# Altium PCB RD15002WV-20150923.PcbDoc (part 2 of 2)
Units mil, origin at the board's own origin, x right, y up, seen from the top; angles counter-clockwise.
Board outline 4341.03 x 4341.12 mil, 2 copper layers (Top Layer, Bottom Layer); 295 components, 256 nets, 1005 pads, 234 vias.
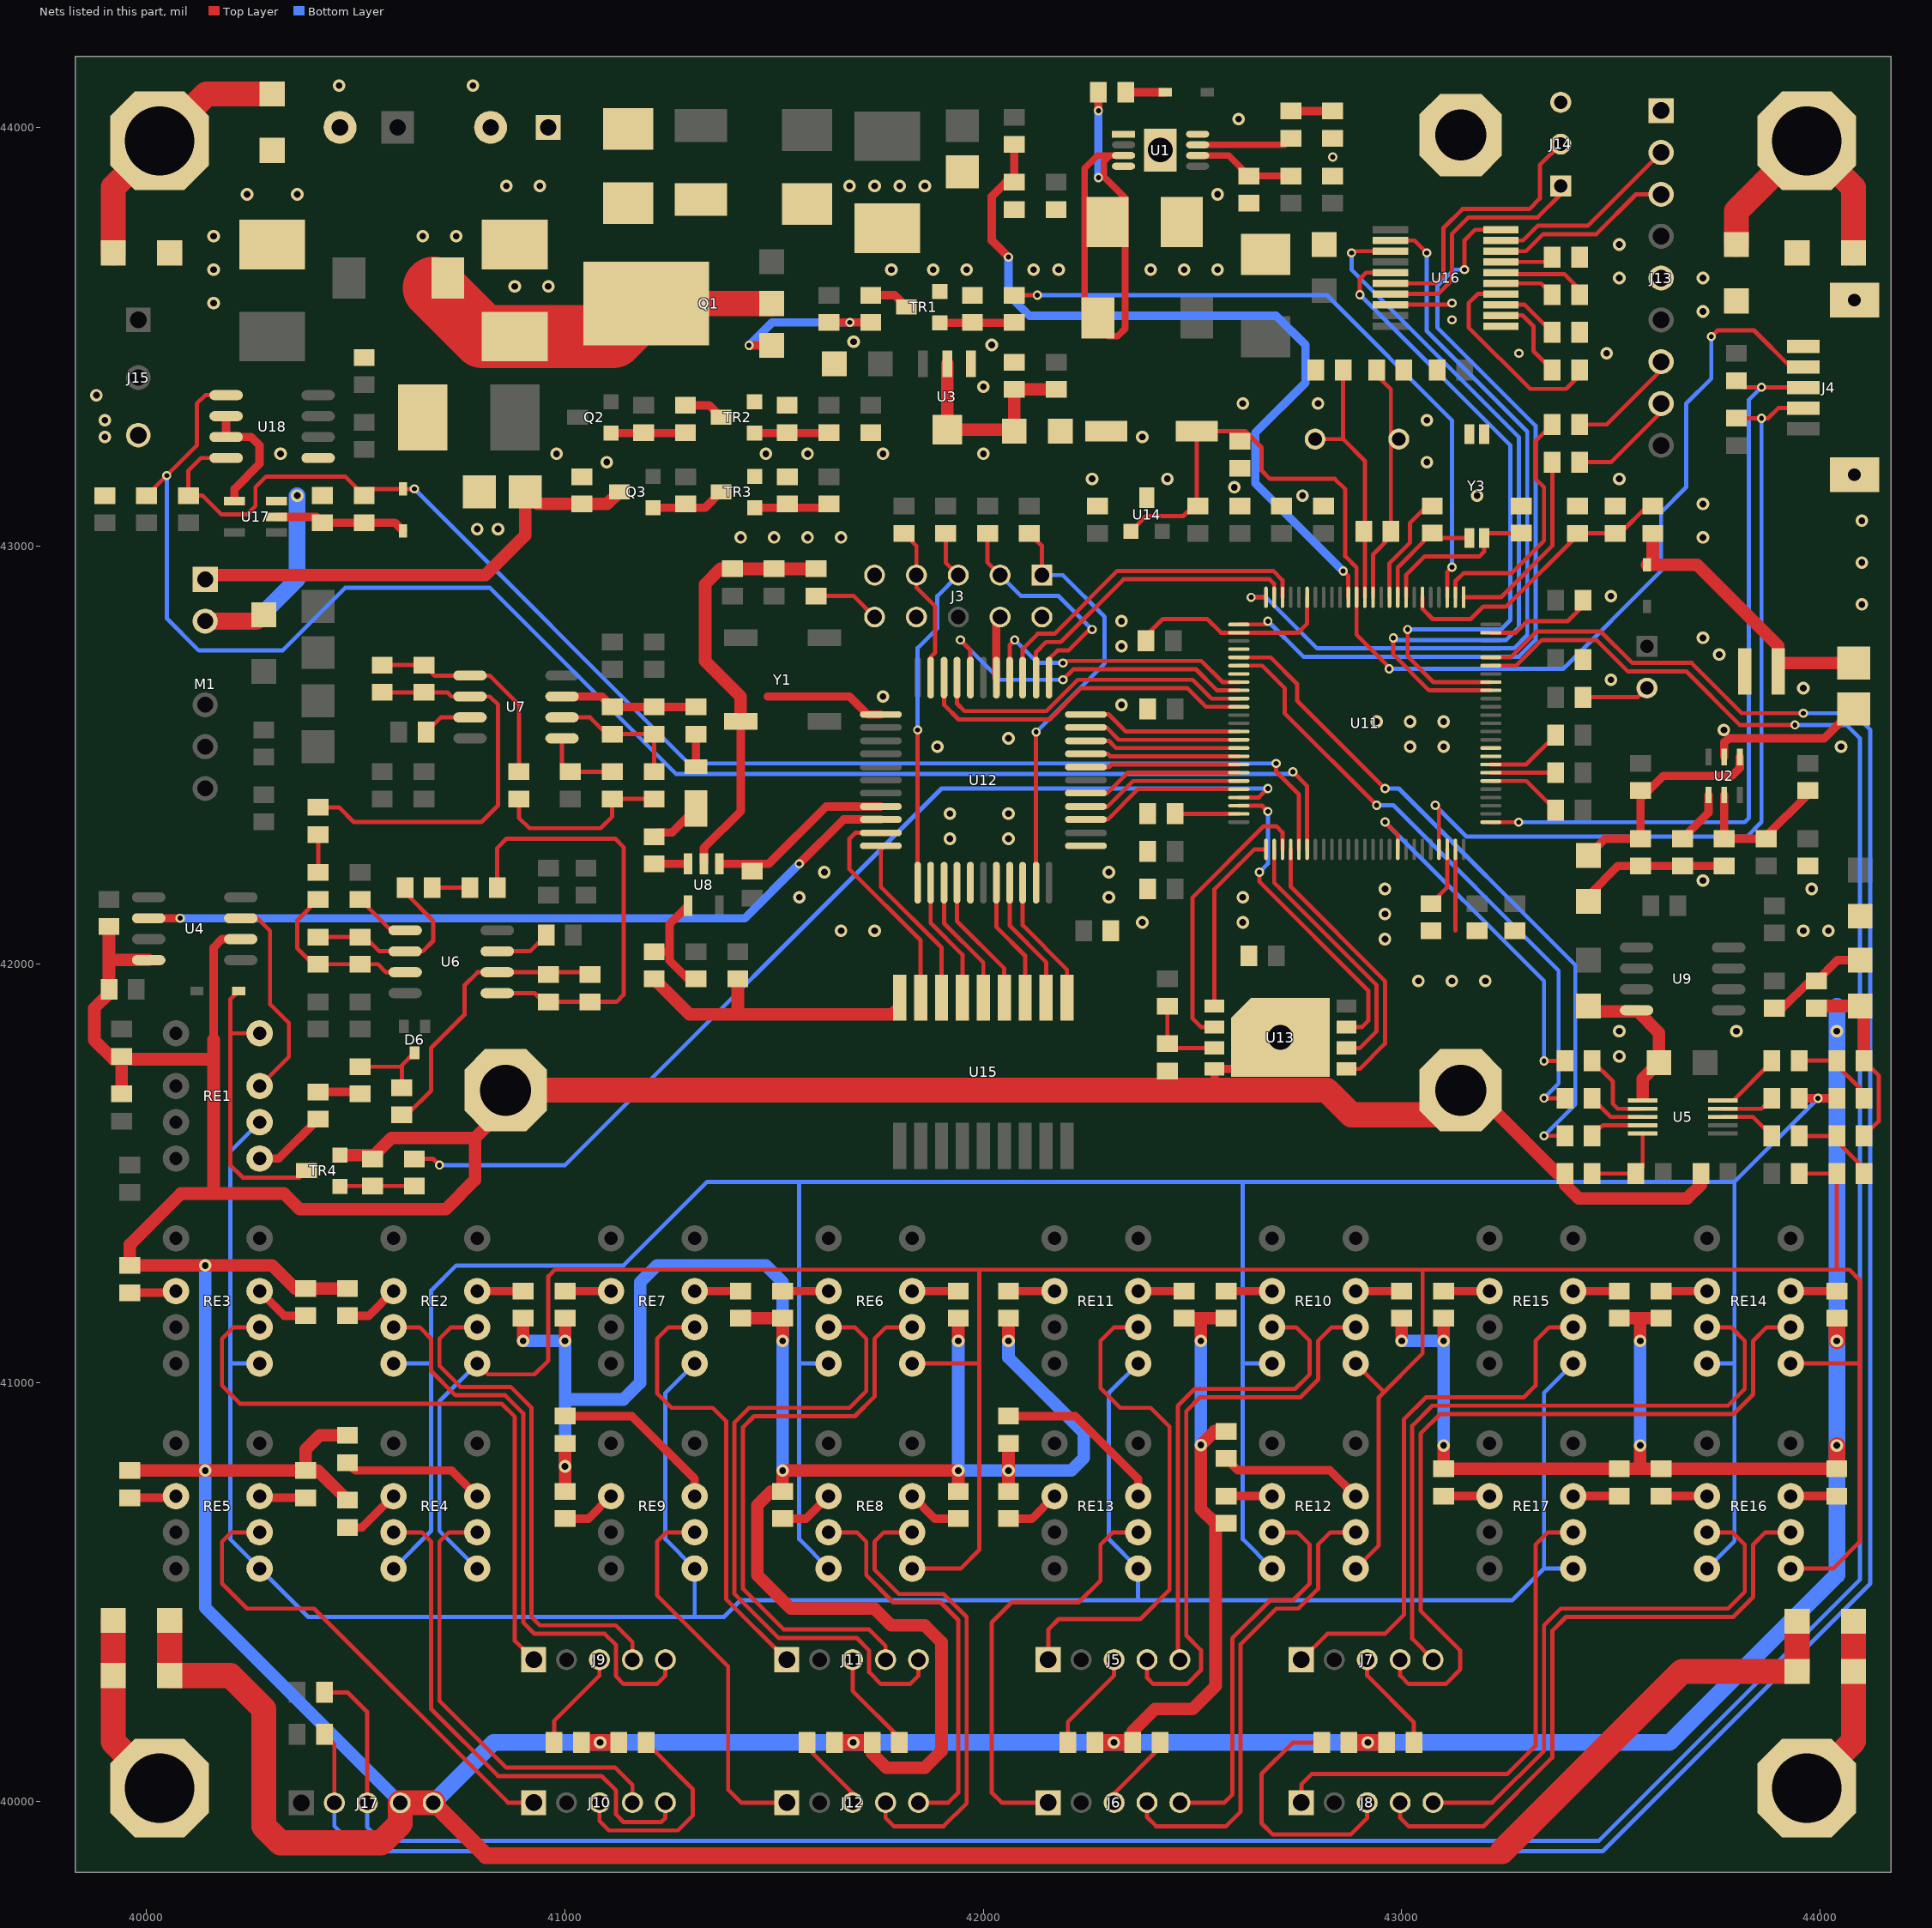
[diagram p2: the nets of this part, all layers, seen from the top]

## Via types
v1: diameter 30, hole 16, Top Layer to Bottom Layer, 140 vias
v2: diameter 22, hole 12, Top Layer to Bottom Layer, 94 vias

## Nets (pads, with @x,y where several pads share a name; then routed paths per layer and width w, separated by ;. In a path a pad name is that pad's centre, name@x,y a point inside that pad or via, vN(x,y) a via of type N, cw(c..) or ccw(c..) an arc to the next point about the centre after c; other vN are vias at no path point) (continued)
DGND: BT1.2 C2.2 C3.2 C4.1 C5.2 C6.2 C8.2 C9.2 C10.1 C12.1 C13.1 C14.1 C15.2 C16.2 C17.2 C18.1 C19.1 C20.2 C21.2 C24.1 C25.2 C28.1 C29.1 C30.2 C31.2 C32.1 C33.2 C34.2 C35.2 C36.1 C37.1 C45.1 C54.1 C55.1 C56.1 C57.1 C58.1 C59.2 C60.2 C61.2 C62.2 C63.1 C64.2 C65.2 C66.2 C67.2 C68.2 C69.2 C70.2 C71.2 C72.2 C73.2 C74.1 C75.1 C76.2 C77.2 C78.2 C79.1 C80.2 C81.1 C82.1 C83.2 C84.1 C85.2 C86.2 C87.2 C88.2 C89.2 C90.2 C125.1 C126.1 C136.1 C137.1 C138.2 C140.2 C141.1 C143.2 C144.2 C145.1 D3.1 D4.1 J1.2 J2.2 J3.2 J3.4 J4. J4.5 J13.1 J13.5 J14.3 J15.3 J17.4 J17.5 M1.2 pad.1 pad.2 pad.3 R6.1 R7.2 R8.1 R9.1 R12.1 R17.2 R18.1 R21.1 R23.1 R25.2 R55.2 R58.1 R59.1 R60.2 R61.1 R62.2 R63.1 R76.2 R79.2 R80.1 R81.2 R82.1 R83.2 R84.1 R85.2 R86.1 R87.2 R88.1 R89.2 R101.1 R102.2 R103.1 R104.2 R105.1 R106.2 R107.1 R108.2 R109.1 R110.2 R111.1 R112.2 R113.1 R114.2 R115.1 R116.2 R121.2 R123.1 S1.1 TR1.2 TR2.2 TR3.2 TR4.2 U1. U1.4 U1.8 U2.2 U3.1 U4.4 U4.6 U5.6 U8.2 U9.4 U11.10 U11.20 U11.27 U11.74 U11.99 U12.5 U12.12 U12.27 U12.34 U13.4 U13.9 U14.3 U15.9 U16.1 U16.18 U17.3 U18.5 Y1.2 Y3.2 Y3.3 | length 33130.1
  Top Layer w10: C65.2@42389,42773 42389,42785 42429,42825 42535,42825 42567.65,42792.35 42752.35,42792.35 42773.99,42813.99 U11.20@42773.99,42877 ; U11.10@42970.83,42877 42970.83,42958.83 43020,43008 43020,43055 43060.38,43095.38 C84.1@43073,43095.38 ; U16.18@42973.22,43576.18 43116.18,43576.18 v2(43120,43580) ; 43128.32,42080.32 U11.74@43128.32,42274.64 ; U11.99@43212.96,42792.35 43272.35,42792.35 43300,42820 43397,42820 43433,42856 C70.2@43433,42870 ; C35.2@44105,41589.63 44140,41624.63 44140,41734.63 C34.2@44105,41769.63
  Top Layer w20: 40160,41820 40160,42040 40180,42060 U4.6@40225,42060 ; U8.2@41332,42240 41332,42278 41420,42366 Y1.2@41420,42580 Y1.2@41425,42580 ; 41485,42640 41680,42640 41723,42597 U12.34@41755,42597 ; U12.27@42031,42685 42031,42821 J3.4@42040,42830 ; 42552.52,41699.48 U13.4@42552.52,41750 U13.9@42603,41750 ; C16.2@43446,42150 43446,42164 43517,42235 R12.1@43771,42235 ; U2.2@43770.6,42495.32 43770.6,42530.6 ; 43770.6,42529 43781.6,42540 44010,42540 C30.2@44080,42610
  Top Layer w30: 39910,42010 U4.4@40005,42010 ; C31.2@39910,42090 39910,41930 39875,41895 39875,41819 39921,41773 40160,41773 ; R25.2@39940,41690 C36.1@39940,41780 ; R107.1@39960,40790 40409,40790 R105.1@40480,40719 ; 40160,41452 40160,41820 ; R108.2@40380,40790 40380,40840 40414,40874 R106.2@40480,40874 ; TR4.2@40462,41544.02 40544.02,41544.02 40585,41585 40785,41585 ; R101.1@40480,41225 40355,41225 40300,41280 R103.1@39960,41280 39960,41330 40082,41452 40329,41452 40366,41415 40715,41415 40785,41485 40785,41585 ; pad.3@40858,41699 40858,41658 40785,41585 ; v1(40900,41100) R102.2@40900,41154 ; R115.1@41000,40740 R116.2@41000,40855 ; v1(41000,41100) R111.1@41000,41154 ; R55.2@41213,41965 41298,41880 41782,41880 41800,41898 U15.9@41800,41920 ; 41413,41881 C45.1@41413,41965 ; R112.2@41420,41154 R109.1@41520,41154 v1(41520,41100) ; Y1.2@41420,42580 41420,42640 41335,42725 41335,42908 41372,42945 C63.1@41600,42945 ; C136.1@41734,40140 41734,40114 41768,40080 41860,40080 41900,40120 41900,40380 41860,40420 41780,40420 41740,40460 41540,40460 41460,40540 41460,40707 41493,40740 R113.1@41520,40740 v1(41520,40790) v1(41940,40790) R114.2@41940,40740 ; v1(41940,41100) R110.2@41940,41154 ; R80.1@42060,40740 R81.2@42060,40855 ; v1(42060,41100) R61.1@42060,41154 ; C55.1@42357,40140 42357,40167 42410,40220 42500,40220 42555.25,40275.25 42555.25,40662.75 42520,40698 v1(42520,40851) 42553,40884 R79.2@42580,40884 ; R62.2@42480,41154 R59.1@42580,41154 ; v1(42520,41100) 42520,41154 ; v1(43000,41100) R60.2@43000,41154 ; v1(43100,40850) R88.1@43100,40794 R87.2@44039.98,40794.02 ; v1(43100,41100) R84.1@43100,41154 ; pad.2@43141,41699 43173,41699 43372.37,41499.63 R23.1@43390,41499.63 43390,41473 43423,41440 43682,41440 43715,41473 C32.1@43715,41499.63 ; C60.2@43446,41900 43459,41887 43564.37,41887 43615,41836.37 C33.2@43615,41765 43576,41726 43576,41684 ; R85.2@43520,41154 R82.1@43620,41154 ; 43570,40794 v1(43570,40850) ; v1(43570,41100) 43570,41154 ; C58.1@43991.37,41895 43996.37,41900 C59.2@44095.74,41900 44105,41890.74 C34.2@44105,41769.63
  Top Layer w40: M1.2@40140,42820 40265,42820 R17.2@40280,42835 ; J17.5@40684.96,39996 40810.96,39870 43230,39870 43240,39880 ; C125.1@41039,40140 C126.1@41129,40140 ; C137.1@41644,40140 C136.1@41734,40140 ; C54.1@42267,40140 C55.1@42357,40140 ; C57.1@42874,40140 C56.1@42964,40140 ; R87.2@44039.98,40794.02 v1(44040,40850) ; v1(44040,41100) R83.2@44040,41154
  Top Layer w60: C85.2@40055,40432 C86.2@40055,40300 40200,40300 40280,40220 40280,39940 40320,39900 40560,39900 40606.22,39946.22 J17.4@40606.22,39996 J17.5@40684.96,39996 ; pad.3@40858,41699 42821,41699 42880,41640 43082,41640 pad.2@43141,41699 ; 43240,39880 43670,40310 C88.2@43945,40310 C87.2@43945,40430
  Bottom Layer w30: v1(40140,41280) 40140,40462.22 J17.4@40606.22,39996 ; v1(40900,41100) v1(41000,41100) v1(41000,40800) ; 41000,40960 41140,40960 41180,41000 41180,41240 41220,41280 41480,41280 41520,41240 v1(41520,40790) ; v1(41940,41100) v1(41940,40790) 42210,40790 42240,40820 42240,40880 42060,41060 v1(42060,41100) ; v1(42520,40851) v1(42520,41100) ; v1(43000,41100) v1(43100,41100) v1(43100,40850) ; v1(43570,40850) v1(43570,41100)
  Bottom Layer w40: M1.2@40140,42820 40260,42820 40360,42920 v1(40360,43120) ; J17.4@40606.22,39996 J17.5@40684.96,39996 40828.96,40140 v1(41084,40140) v1(41689,40140) v1(42312,40140) v1(42919,40140) 43640,40140 44040,40540 44040,41900
  other v1: 40140,40790 42060,40790 43520,41780 43520,41840 43800,41840 44040,41840 43040,41960 43120,41960 43200,41960 42960,42060 41660,42080 41740,42080 43960,42080 44020,42080 42380,42100 42620,42100 42960,42120 41560,42160 42300,42160 42620,42160 42960,42180 43980,42180 43720,42200 41620,42220 42300,42220 41920,42300 42060,42300 41920,42360 42060,42360 41890,42520 43020,42520 43100,42520 44050,42520 42060,42540 43770,42560 42940,42580 43020,42580 43100,42580 42330,42620 41760,42640 43960,42660 43500,42680 43759,42740 42330,42760 43720,42780 42330,42820 44100,42860 43500,42880 44100,42960 41420,43020 41500,43020 41580,43020 41660,43020 43720,43020 40790,43040 40840,43040 44100,43060 43720,43100 42763,43120 43180,43120 42600,43140 42260,43160 42440,43160 43520,43160 41100,43200 43060,43200 40320,43220 40980,43220 41480,43220 41580,43220 41760,43220 42000,43220 39900,43260 42380,43260 39900,43300 43060,43300 42620,43340 42800,43340 39880,43360 42000,43380 43490,43460 42020,43480 41690,43488 43720,43560 40160,43580 40880,43620 40960,43620 43520,43640 43720,43640 40160,43660 41780,43660 41880,43660 41960,43660 42120,43660 42180,43660 42400,43660 42480,43660 42560,43660 43520,43720 40160,43740 40660,43740 40740,43740 40240,43840 40360,43840 42560,43840 40860,43860 40940,43860 41680,43860 41740,43860 41800,43860 41860,43860 42610,44020 40460,44100 40780,44100
  other v2: 43280,43460 43120,43540 42835,43929
DTU_DCD: J13.7 R68.1 | length 268.8
  Top Layer w10: R68.1@43425,43290 43490,43290 43620,43420 J13.7@43620,43440
DTU_ONOFF: J13.8 R69.1 | length 264.7
  Top Layer w10: R69.1@43425,43200 43500,43200 43620,43320 J13.8@43620,43340
DTUPWR_SW: R5.2 U11.3 | length 1597.6
  Top Layer w10: R5.2@42073.99,43599 v2(42129,43599) ; U11.3@43108.63,42877 43108.63,42937.63 v2(43120,42949)
  Bottom Layer w10: v2(42129,43599) 42821,43599 43120,43300 v2(43120,42949)
FM_HOLD1: U11.48 U13.7 | length 749.9
  Top Layer w10: U11.48@42610.6,42378.97 42666.03,42378.97 v2(42680,42365) ; v2(42660,42220) 42660,42197 42920,41937 42920,41865 42905,41850 U13.7@42867.48,41850
  Bottom Layer w10: v2(42660,42220) 42680,42240 v2(42680,42365)
GND: 
GND_EARTH1: C61.1 C62.1 pad.4 | length 629.4
  Top Layer w60: C61.1@39920,43700 39920,43857 40143,44080 C62.1@40300,44080
GND_EARTH2: C85.1 C86.1 pad.5 | length 447
  Top Layer w60: C85.1@39920,40432 39920,40142 pad.5@40031,40031
GND_EARTH3: C87.1 C88.1 pad.6 | length 445.4
  Top Layer w60: pad.6@43968,40031 44080,40143 C88.1@44080,40310 C87.1@44080,40430
GND_EARTH4: C89.1 C90.1 pad.7 | length 632
  Top Layer w60: C89.1@43800,43720 43800,43800 pad.7@43968,43968 44080,43856 C90.1@44080,43700
GPIO0: U11.39 U12.22 | length 382.5
  Top Layer w10: U12.22@42245,42597 42300,42597 42340.87,42556.13 U11.39@42610.6,42556.13
GPIO1: U11.40 U12.21 | length 377.8
  Top Layer w10: U12.21@42245,42566 42294,42566 42323.55,42536.45 U11.40@42610.6,42536.45
GPIO2: U11.41 U12.20 | length 372.7
  Top Layer w10: U12.20@42245,42534 42300,42534 42317.24,42516.76 U11.41@42610.6,42516.76
GPIO3: U11.42 U12.19 | length 368.1
  Top Layer w10: U12.19@42245,42503 42297,42503 42302.92,42497.08 U11.42@42610.6,42497.08
GPIO4: U11.43 U12.18 | length 368.2
  Top Layer w10: U12.18@42245,42471 42300,42471 42306.39,42477.39 U11.43@42610.6,42477.39
GPIO5: U11.44 U12.16 | length 385.8
  Top Layer w10: U12.16@42245,42409 42296,42409 42344.71,42457.71 U11.44@42610.6,42457.71
GPIO6: U11.45 U12.15 | length 390.9
  Top Layer w10: U12.15@42245,42377 42297,42377 42358.02,42438.02 U11.45@42610.6,42438.02
GPIO7: U11.46 U12.14 | length 395.6
  Top Layer w10: U12.14@42245,42346 42297,42346 42369.34,42418.34 U11.46@42610.6,42418.34
GREEN: R26.1 R29.1 RE2.5 RE4.5 RE6.5 RE8.5 RE10.5 RE12.5 RE14.5 RE16.5 | length 7297.5
  Top Layer w10: RE2.5@40790,41045.79 40815.79,41020 40927,41020 40960,41053 40960,41254 40976,41270 44070,41270 44095,41245 44095,40620 44030.79,40555.79 RE16.5@43930,40555.79 ; RE8.5@41830,40555.79 41945.79,40555.79 41990,40600 41990,41270 ; RE6.5@41830,41045.79 41989.79,41045.79 ; RE12.5@42890,40555.79 42945,40610.79 42945,40965 43050,41070 43050,41270 ; RE10.5@42890,41045.79 42957.89,40977.9 ; RE14.5@43930,41045.79 44094.79,41045.79 ; R26.1@43950,41499.63 R29.1@44040,41499.63 44040,41270
  Bottom Layer w10: RE4.5@40790,40555.79 40700,40645.79 40700,40955.79 RE2.5@40790,41045.79
GREEN_CH1: J9.4 RE2.6 | length 1235.7
  Top Layer w10: RE2.6@40790,41132.4 40727.4,41132.4 40700,41105 40700,41040 40750,40990 40870,40990 40920,40940 40920,40440 40940,40420 41121,40420 41161.22,40379.78 J9.4@41161.22,40338
GREEN_CH2: J10.4 RE4.6 | length 1066.4
  Top Layer w10: RE4.6@40790,40642.4 40722.4,40642.4 40700,40620 40700,40240 40860,40080 41120,40080 41161.22,40038.78 J10.4@41161.22,39996.26
GREEN_CH3: J11.4 RE6.6 | length 1401
  Top Layer w10: J11.4@41766.22,40338 41766.22,40371 41727.22,40410 41523,40410 41425,40508 41425,40893 41452,40920 41693,40920 41740,40967 41740,41105 41767.4,41132.4 RE6.6@41830,41132.4
GREEN_CH4: J12.4 RE8.6 | length 1139.3
  Top Layer w10: J12.4@41766.22,39996.26 41766.22,39959.78 41786,39940 41905,39940 41960,39995 41960,40440 41905,40495 41798,40495 41740,40553 41740,40620 41762.4,40642.4 RE8.6@41830,40642.4
GREEN_CH5: J5.4 RE10.6 | length 1367.8
  Top Layer w10: J5.4@42391.22,40338 42391.22,40294.78 42406,40280 42487,40280 42520,40313 42520,40361 42485,40396 42485,40932 42518,40965 42758,40965 42800,41007 42800,41100 42832.4,41132.4 RE10.6@42890,41132.4
GREEN_CH6: J6.4 RE12.6 | length 1129.6
  Top Layer w10: J6.4@42391.22,39996.26 42391.22,39961.78 42413,39940 42580,39940 42615,39975 42615,40375 42700,40460 42753,40460 42800,40507 42800,40613 42829.4,40642.4 RE12.6@42890,40642.4
GREEN_CH7: J7.4 RE14.6 | length 1872.4
  Top Layer w10: J7.4@42996.22,40338 42996.22,40299.78 43016,40280 43105,40280 43140,40315 43140,40360 43045,40455 43045,40878 43092,40925 43793,40925 43840,40972 43840,41100 43872.4,41132.4 RE14.6@43930,41132.4
GREEN_CH8: J8.4 RE16.6 | length 1520.1
  Top Layer w10: J8.4@42996.22,39996.26 42996.22,39959.78 43016,39940 43196,39940 43360,40104 43360,40407 43393,40440 43792,40440 43840,40488 43840,40613 43869.4,40642.4 RE16.6@43930,40642.4
INIT: J3.8
ISP_EN: C63.2 J3.10 | length 160.7
  Top Layer w10: C63.2@41600,42880 41690,42880 J3.10@41740,42830
ISP_TCK: J3.1 R64.1 U12.10 | length 1006.8
  Top Layer w10: R64.1@42110,43030 42140,43000 J3.1@42140,42930 ; U12.10@42126,42195 v2(42126,42555)
  Bottom Layer w10: v2(42126,42555) 42290,42719 42290,42830 42190,42930 J3.1@42140,42930
ISP_TDI: J3.5 R66.2 U12.1 | length 887.6
  Top Layer w10: U12.1@41843,42195 v2(41843,42560) ; R66.2@41910,43030 41910,42960 J3.5@41940,42930
  Bottom Layer w10: v2(41843,42560) 41843,42756 41890,42803 41890,42880 J3.5@41940,42930
ISP_TDO: J3.7 R67.1 U12.32 | length 380.6
  Top Layer w10: R67.1@41810,43030 41840,43000 41840,42900 41885,42855 41885,42745 41874,42734 U12.32@41874,42685
ISP_TMS: J3.3 R65.1 U12.23 | length 559.3
  Top Layer w10: R65.1@42010,43030 42010,42960 J3.3@42040,42930 ; U12.23@42157,42685 42157,42730 42177,42750 ; 42181,42750 42203,42750 42253,42800 v2(42260,42800)
  Bottom Layer w10: J3.3@42040,42930 42090,42880 42180,42880 v2(42260,42800)
ISP_TRST: J3.9
NetBT1_1: BT1.1 C30.1 D5.2 R22.2 | length 710.4
  Top Layer w30: D5.2@43586,42955 43706,42955 43900,42761 BT1.1@43900,42700 ; 43600,42955 R22.2@43600,43030 ; BT1.1@43900,42720 C30.1@44080,42720
NetC1_1: C1.1 D3.2 L2.1 U1.3 | length 1192.1
  Top Layer w16: L2.1@42242,43540 42242,43902 42272.82,43932.82 U1.3@42335,43932.82 42301.82,43932.82 42288,43919 42288,43882 42339,43831 42339,43519 42321,43501 L2.1@42300,43501
  Top Layer w20: v2(42275,44040) C1.1@42275,44084
  Bottom Layer w20: v2(42275,43880) v2(42275,44040)
NetC1_2: C1.2 D2.2 U1.1 | length 95
  Top Layer w20: C1.2@42340,44084 D2.2@42435,44084
NetC2_1: C2.1 L1.1 Q1.2 | length 887.8
  Top Layer w60: Q1.2@41194,43579 Q1.2@41494,43579
  Top Layer w150: L1.1@40687,43616 40803,43500 41115,43500 Q1.2@41194,43579
NetC7_1: C7.1 R8.2 | length 100
  Top Layer w20: C7.1@42735,44039 R8.2@42835,44039
NetC7_2: C7.2 U1.7 | length 229.3
  Top Layer w16: U1.7@42512.17,43958.41 42719.41,43958.41 C7.2@42735,43974
NetC11_2: C11.2 R11.2 R12.2 U2.5 | length 361.4
  Top Layer w20: U2.5@43770.6,42404.76 43770.6,42300.4 R12.2@43771,42300 C11.2@43871,42300 43871,42306 43971,42406 R11.2@43971,42415
NetC13_2: C13.2 C16.1 R10.1 U2.1 | length 531.1
  Top Layer w20: C16.1@43446,42260 43486,42300 C13.2@43571,42300 43571,42396 43625,42450 43789,42450 43808,42469 U2.1@43808,42495.32
NetC14_2: C14.2 U2.4 | length 130.5
  Top Layer w20: C14.2@43671,42300 43733.2,42362.2 U2.4@43733.2,42404.76
NetC17_1: C17.1 C18.2 R13.1 U3.2 | length 518.8
  Top Layer w30: U3.2@41914.1,43435 U3.2@41914.1,43277.52 42070.48,43277.52 C17.1@42074,43274 C18.2@42074,43374 R13.1@42174,43374
NetC24_2: C24.2 C25.1 M1.1 Q3.3 | length 1161.6
  Top Layer w30: M1.1@40140,42920 40150,42930 40810,42930 40905,43025 C25.1@40905,43129 40934,43100 41101.1,43100 Q3.3@41130.11,43129.01
NetC34_1: C34.1 R33.1 R34.2 | length 200.7
  Top Layer w10: R33.1@43950,41769.63 44029.37,41769.63 44105,41694 R34.2@44105,41679.63
NetC35_1: C35.1 R28.1 R29.2 | length 206.9
  Top Layer w10: R28.1@43950,41589.63 C35.1@44040,41589.63 44040,41577 44105,41512 R29.2@44105,41499.63
NetC38_1: C38.1 C43.2 R35.1 U6.1 | length 1085.1
  Top Layer w10: U6.1@40838,41931 40927,41931 40948,41910 41123,41910 41140,41927 41140,42280 41120,42300 40860,42300 40838,42278 C43.2@40838,42183
NetC38_2: C38.2 R35.2 R40.1 U6.2 | length 694.5
  Top Layer w10: R40.1@40610,41640 40622,41640 40680,41698 40680,41800 40760,41880 40760,41950 40791,41981 41054,41981 R35.2@41060,41975
NetC39_1: C39.1 R36.1 R43.2 U7.1 | length 526.4
  Top Layer w10: R36.1@40563,42715 C39.1@40663,42715 40688,42690 40820,42690 40890,42620 R43.2@40890,42460
NetC39_2: C39.2 R36.2 R42.1 U7.2 | length 990.5
  Top Layer w10: R42.1@40410,42375 40460,42375 40495,42340 40800,42340 40840,42380 40840,42620 40820,42640 40729,42640 40719,42650 R36.2@40563,42650
NetC40_1: C40.1 C44.2 R37.1 U6.7 | length 419.3
  Top Layer w10: C44.2@40410,42155 40360,42105 40360,42038 40398,42000 40553,42000 40572,41981 U6.7@40618,41981
NetC40_2: C40.2 R37.2 R41.1 U6.6 | length 454.2
  Top Layer w10: R37.2@40410,42065 40522,42065 40556,42031 40660,42031 40685,42056 40685,42104 40618,42171 R41.1@40618,42183
NetC41_1: C41.1 R38.1 R48.1 U7.7 | length 330.4
  Top Layer w20: U7.7@40993,42640 41088,42640 C41.1@41113,42615 R48.1@41313,42615
NetC41_2: C41.2 R38.2 R44.1 U7.6 | length 326.6
  Top Layer w10: U7.6@40993,42590 41060,42590 41100,42550 R38.2@41213,42550 R44.1@41213,42460
NetC42_1: C42.1 R39.2 | length 102.1
  Top Layer w20: C42.1@40410,41695 40505,41695 R39.2@40510,41690
NetC43_1: C43.1 R41.2 | length 90
  Top Layer w10: R41.2@40683,42183 C43.1@40773,42183
NetC44_1: C44.1 R42.2 | length 90
  Top Layer w10: C44.1@40410,42220 R42.2@40410,42310
NetC58_2: C58.2 C59.1 R90.1 | length 252.4
  Top Layer w20: R90.1@43891,41895 43910,41895 43975,41960 C58.2@43991.37,41960 44041.37,42010 C59.1@44095.74,42010
NetC76_1: C76.1 U11.73 | length 145.6
  Top Layer w10: C76.1@43070,42145 43108.63,42183.63 U11.73@43108.63,42274.64
NetC78_1: C78.1 U11.49 | length 151.9
  Top Layer w10: C78.1@42458.72,42359.28 U11.49@42610.6,42359.28
NetC139_1: C139.1 U16.2 | length 212.2
  Top Layer w10: U16.2@43237,43550.59 43289.41,43550.59 43315,43525 43315,43465 C139.1@43360,43420
NetC139_2: C139.2 U16.4 | length 496.2
  Top Layer w10: U16.4@43237,43601.77 43181.77,43601.77 43160,43580 43160,43522 43307,43375 43393,43375 43425,43407 C139.2@43425,43420
NetC140_1: C140.1 U16.7 | length 127.7
  Top Layer w10: U16.7@43237,43678.54 43348.54,43678.54 C140.1@43360,43690
NetC141_2: C141.2 U16.3 | length 150.4
  Top Layer w10: U16.3@43237,43576.18 43293.82,43576.18 C141.2@43360,43510
NetC142_1: C142.1 U16.5 | length 134.3
  Top Layer w10: U16.5@43237,43627.36 43332.64,43627.36 C142.1@43360,43600
NetC142_2: C142.2 U16.6 | length 217.5
  Top Layer w10: U16.6@43237,43652.95 43240.95,43649 43389,43649 43425,43613 C142.2@43425,43600
NetC145_2: C145.2 D40.1 R120.2 U17.2 | length 316.2
  Top Layer w20: U17.2@40310,43069 40406.25,43069 C145.2@40420,43055.25 40593.31,43055.25 D40.1@40612.56,43036
NetD1_1: D1.1 J1.1
NetD1_2: D1.2 F1.1
NetD6_3: D6.3 R39.1 R40.2 | length 195.9
  Top Layer w10: R39.1@40510,41755 40610,41755 ; R40.2@40610,41705 40610,41758.5 D6.3@40640,41788.5
NetD7_1: D7.1 R52.2 | length 127.8
  Top Layer w20: R52.2@41213,42305 41223,42315 41255.95,42315 D7.1@41313,42372.05
NetD7_2: D7.2 R48.2 | length 77.6
  Top Layer w20: D7.2@41313,42472.44 R48.2@41313,42550
NetJ16_2: J16.2 R122.1 | length 162.1
  Top Layer w10: R122.1@43433,42638 43564,42638 J16.2@43586,42660
NetQ1_1: Q1.1 R1.1 R3.1 | length 417.8
  Top Layer w20: v2(41440,43479) Q1.1@41494,43479 ; R1.1@41631,43534 R3.1@41731,43534
  Bottom Layer w20: v2(41440,43479) 41495,43534 v2(41681,43534)
NetQ2_1: Q2.1 R14.1 R15.1 | length 177
  Top Layer w20: Q2.1@41110.02,43269.64 R15.1@41287.02,43269.64
NetQ3_1: Q3.1 R19.1 TR3.3 | length 178.7
  Top Layer w20: Q3.1@41210.11,43091.02 41335.11,43091.02 TR3.3@41373.1,43129.01
NetR3_2: R3.2 TR1.3 | length 96.6
  Top Layer w20: R3.2@41731,43599 41788.01,43599 TR1.3@41816,43571.01
NetR4_2: R4.2 R9.2 U1.6 | length 243.1
  Top Layer w16: U1.6@42512.17,43932.82 42586.18,43932.82 R9.2@42635,43884 R4.2@42735,43884
NetR5_1: R5.1 R6.2 TR1.1 | length 177
  Top Layer w20: TR1.1@41896,43533.02 R5.1@42073.01,43533.02
NetR15_2: R15.2 TR2.3 | length 96.6
  Top Layer w20: R15.2@41288.01,43335.63 41345.02,43335.63 TR2.3@41373.01,43307.64
NetR16_1: R16.1 R18.2 TR2.1 | length 178.4
  Top Layer w20: TR2.1@41453.01,43269.64 41630.02,43269.64 R16.1@41631,43270.63
NetR20_1: R20.1 R21.2 TR3.1 | length 181.7
  Top Layer w20: TR3.1@41453.1,43091.02 41622.11,43091.02 R20.1@41631.1,43100
NetR23_2: R23.2 R24.2 U5.10 | length 207.6
  Top Layer w10: R23.2@43455,41499.63 R24.2@43560,41499.63 43575.87,41515.5 U5.10@43575.87,41595.63
NetR27_2: R27.2 U5.9 | length 131.5
  Top Layer w10: R27.2@43455,41589.63 43480.68,41615.32 U5.9@43575.87,41615.32
NetR28_2: R28.2 U5.3 | length 135.8
  Top Layer w10: U5.3@43768,41635 43839.63,41635 R28.2@43885,41589.63
NetR30_2: R30.2 U5.8 | length 139.4
  Top Layer w10: R30.2@43455,41679.63 43499.63,41635 U5.8@43575.87,41635
NetR31_2: R31.2 U5.4 | length 127.3
  Top Layer w10: U5.4@43768,41654.68 43860.06,41654.68 R31.2@43885,41679.63
NetR32_2: R32.2 U5.7 | length 199.9
  Top Layer w10: R32.2@43455,41769.63 43505,41719.63 43505,41666 43516.32,41654.68 U5.7@43575.87,41654.68
NetR33_2: R33.2 U5.5 | length 158
  Top Layer w10: U5.5@43768,41674.37 43792.37,41674.37 43885,41767 R33.2@43885,41769.63
NetR43_1: R43.1 R44.2 R45.2 | length 432
  Top Layer w10: R43.1@40890,42395 40890,42350 40915,42325 41085,42325 41113,42353 R45.2@41113,42395 R44.2@41213,42395
NetR45_1: R45.1 R51.1 U7.5 | length 188.3
  Top Layer w10: U7.5@40993,42540 40993,42480 R51.1@41013,42460 R45.1@41113,42460
NetR47_1: R47.1 U6.3 | length 133.2
  Top Layer w10: U6.3@40838,42031 40916,42031 R47.1@40955,42070
NetR49_1: R49.1 U6.5 | length 138.7
  Top Layer w10: R49.1@40510,42155 40584,42081 U6.5@40618,42081
NetR50_1: R50.1 U7.3 | length 119.5
  Top Layer w10: R50.1@40668,42555 40703,42590 U7.3@40773,42590
NetR52_1: R52.1 U8.3 | length 81
  Top Layer w20: R52.1@41213,42240 U8.3@41294,42240
NetR53_2: R53.2 R55.1 U8.4 | length 267.5
  Top Layer w20: R55.1@41213,42030 41250,42030 ; U8.4@41294,42140 41250,42096 41250,42009 41294,41965 R53.2@41313,41965
NetR57_1: R57.1 R58.2 TR4.1 | length 178.4
  Top Layer w10: TR4.1@40462,41469.02 40462.98,41470 R57.1@40639.99,41470
NetR59_2: R59.2 RE10.2 | length 110
  Top Layer w20: R59.2@42580,41219 RE10.2@42690,41219.02
NetR60_1: R60.1 RE10.7 | length 110
  Top Layer w20: RE10.7@42890,41219.02 R60.1@43000,41219
NetR61_2: R61.2 RE11.2 | length 110
  Top Layer w20: R61.2@42060,41219 RE11.2@42170,41219.02
NetR62_1: R62.1 RE11.7 | length 110
  Top Layer w20: RE11.7@42370,41219.02 R62.1@42480,41219
NetR63_2: R63.2 RE12.2 | length 110
  Top Layer w20: R63.2@42580,40729 RE12.2@42690,40729.02
NetR68_2: R68.2 U11.2 | length 592.9
  Top Layer w10: U11.2@43128.32,42877 43128.32,42915.32 43148,42935 43263,42935 43340,43012 43340,43140 43320,43160 43320,43250 R68.2@43360,43290
NetR69_2: R69.2 U11.1 | length 462.9
  Top Layer w10: U11.1@43148,42877 43237,42877 43360,43000 R69.2@43360,43200
NetR70_1: R70.1 U11.81 | length 184
  Top Layer w10: U11.81@43212.96,42438.02 43297.98,42438.02 R70.1@43368,42368
NetR71_1: R71.1 U11.82 | length 154.7
  Top Layer w10: U11.82@43212.96,42457.71 R71.1@43367.71,42457.71
NetR72_1: R72.1 U11.83 | length 184.3
  Top Layer w10: U11.83@43212.96,42477.39 43297.39,42477.39 R72.1@43368,42548
NetR75_2: R75.2 R76.1 U13.3 | length 206.7
  Top Layer w10: R75.2@42440,41900 R76.1@42440,41810 42450,41800 U13.3@42552.52,41800
NetR79_1: R79.1 RE12.7 | length 347.3
  Top Layer w20: R79.1@42580,40819 42608,40791 42828.02,40791 RE12.7@42890,40729.02
NetR80_2: R80.2 RE13.2 | length 132.4
  Top Layer w20: R80.2@42060,40675 42115.98,40675 RE13.2@42170,40729.02
NetR81_1: R81.1 RE13.7 | length 413.1
  Top Layer w20: R81.1@42060,40920 42220,40920 42370,40770 RE13.7@42370,40729.02
NetR82_2: R82.2 RE14.2 | length 110
  Top Layer w20: R82.2@43620,41219 RE14.2@43730,41219.02
NetR83_1: R83.1 RE14.7 | length 110
  Top Layer w20: RE14.7@43930,41219.02 R83.1@44040,41219
NetR84_2: R84.2 RE15.2 | length 110
  Top Layer w20: R84.2@43100,41219 RE15.2@43210,41219.02
NetR85_1: R85.1 RE15.7 | length 110
  Top Layer w20: RE15.7@43410,41219.02 R85.1@43520,41219
NetR86_2: R86.2 RE16.2 | length 110
  Top Layer w10: RE16.2@43728.02,40729.02 RE16.2@43730,40729.02
  Top Layer w20: R86.2@43620,40729 RE16.2@43728,40729
NetR87_1: R87.1 RE16.7 | length 110
  Top Layer w20: RE16.7@43930,40729.02 R87.1@44039.98,40729.02
NetR88_2: R88.2 RE17.2 | length 110
  Top Layer w20: R88.2@43100,40729 RE17.2@43210,40729.02
NetR89_1: R89.1 RE17.7 | length 110
  Top Layer w20: RE17.7@43410,40729.02 R89.1@43519.97,40729.03
NetR101_2: R101.2 RE2.2 | length 134.4
  Top Layer w20: R101.2@40480,41160 40530.98,41160 RE2.2@40590,41219.02
NetR102_1: R102.1 RE2.7 | length 110
  Top Layer w20: RE2.7@40790,41219.02 R102.1@40900,41219
NetR103_2: R103.2 RE3.2 | length 111.7
  Top Layer w20: R103.2@39960,41215 40065.98,41215 RE3.2@40070,41219.02
NetR104_1: R104.1 RE3.7 | length 134.4
  Top Layer w20: RE3.7@40270,41219.02 40329.02,41160 R104.1@40380,41160
NetR105_2: R105.2 RE4.2 | length 141.1
  Top Layer w20: R105.2@40480,40654 40514.98,40654 RE4.2@40590,40729.02
NetR106_1: R106.1 RE4.7 | length 343.1
  Top Layer w20: R106.1@40480,40809 40499,40790 40729.02,40790 RE4.7@40790,40729.02
NetR107_2: R107.2 RE5.2 | length 111.7
  Top Layer w20: R107.2@39960,40725 40065.98,40725 RE5.2@40070,40729.02
NetR108_1: R108.1 RE5.7 | length 111.7
  Top Layer w20: RE5.7@40270,40729.02 40274.02,40725 R108.1@40380,40725
NetR109_2: R109.2 RE6.2 | length 110
  Top Layer w20: R109.2@41520,41219 RE6.2@41630,41219.02
NetR110_1: R110.1 RE6.7 | length 110
  Top Layer w20: RE6.7@41830,41219.02 R110.1@41940,41219
NetR111_2: R111.2 RE7.2 | length 110
  Top Layer w20: R111.2@41000,41219 RE7.2@41110,41219.02
NetR112_1: R112.1 RE7.7 | length 110
  Top Layer w20: RE7.7@41310,41219.02 R112.1@41420,41219
NetR113_2: R113.2 RE8.2 | length 132.4
  Top Layer w20: R113.2@41520,40675 41575.98,40675 RE8.2@41630,40729.02
NetR114_1: R114.1 RE8.7 | length 132.4
  Top Layer w20: RE8.7@41830,40729.02 41884.02,40675 R114.1@41940,40675
NetR115_2: R115.2 RE9.2 | length 132.4
  Top Layer w20: R115.2@41000,40675 41055.98,40675 RE9.2@41110,40729.02
NetR116_1: R116.1 RE9.7 | length 413.1
  Top Layer w20: R116.1@41000,40920 41160,40920 41310,40770 RE9.7@41310,40729.02
NetU17_4: U17.4 U18.2 U18.3 | length 296.1
  Top Layer w20: U18.2@40190,43310 U18.3@40190,43260 40250,43260 40270,43240 40270,43196 40210,43136 U17.4@40210,43107
OSC32_IN: C81.2 U11.8 Y3.1 | length 389.5
  Top Layer w10: U11.8@43010.21,42877 43010.21,42930.21 43055,42975 43186,42975 43197.06,42986.06 Y3.1@43197.06,43019 43208.43,43030.38 C81.2@43285.68,43030.38
OSC32_OUT: C84.2 U11.9 Y3.4 | length 271.5
  Top Layer w10: U11.9@42990.52,42877 42990.52,42947.9 43061.62,43019 Y3.4@43161.62,43019
OSC_IN: C80.1 R78.1 U11.12 Y2.2 | length 593.7
  Top Layer w10: U11.12@42931.46,42877 42931.46,42979.46 42974,43022 42974,43374 42940,43408 C80.1@42940,43420 ; Y2.2@42974,43255 Y2.2@42993,43255
OSC_OUT: C83.1 R78.2 U11.13 Y2.1 | length 631.4
  Top Layer w10: Y2.1@42793,43255 42860,43255 ; C83.1@42860,43420 42860,43255 ; U11.13@42911.78,42877 42911.78,43203.22 42860,43255
R\S\T\: C82.2 J4.4 R77.2 S1.2 U11.14 U14.1 | length 2888.5
  Top Layer w10: U14.1@42353,43035 42389,43071 42478,43071 42510,43103 S1.2@42510,43274 42626,43274 42665,43235 42665,43180 42685,43160 42840,43160 42865,43135 42865,42975 42892.1,42947.9 42892.1,42787.9 v2@42970,42710 ; v2(43740,43500) 43755,43515 43842,43515 43929.36,43427.64 J4.4@43960,43427.64
  Bottom Layer w10: v2(42970,42706) 43386,42706 43620,42940 43620,43080 43680,43140 43680,43340 43740,43400 v2(43740,43500)
RED: RE1.6 RE3.5 RE5.5 RE7.5 RE9.5 RE11.5 RE13.5 RE15.5 RE17.5 | length 6236.5
  Bottom Layer w10: 40200.21,41045.79 RE3.5@40270,41045.79 ; RE1.6@40270,41622.4 40200,41552.4 40200,40625.79 40385.79,40440 41380,40440 41420,40480 43264,40480 43340,40556 43340,40975.79 RE15.5@43410,41045.79 ; 41310,40440 RE9.5@41310,40555.79 41240,40625.79 41240,40975.79 RE7.5@41310,41045.79 ; 42370,40480 RE13.5@42370,40555.79 42300,40625.79 42300,40975.79 RE11.5@42370,41045.79 ; 43340.21,40555.79 RE17.5@43410,40555.79
RED_CH1: J9.1 RE3.6 | length 1543.1
  Top Layer w10: RE3.6@40270,41132.4 40207.4,41132.4 40180,41105 40180,40993 40223,40950 40848,40950 40880,40918 40880,40383 J9.1@40925,40338
RED_CH2: J10.1 RE5.6 | length 1161.2
  Top Layer w10: RE5.6@40270,40642.4 40202.4,40642.4 40180,40620 40180,40520 40240,40460 40400,40460 40863.74,39996.26 J10.1@40925,39996.26
RED_CH3: J11.1 RE7.6 | length 1054.2
  Top Layer w10: RE7.6@41310,41132.4 41247.4,41132.4 41220,41105 41220,40975 41255,40940 41353,40940 41385,40908 41385,40483 J11.1@41530,40338
RED_CH4: J12.1 RE9.6 | length 915.4
  Top Layer w10: RE9.6@41310,40642.4 41242.4,40642.4 41220,40620 41220,40492 41390,40322 41390,40027 41420.74,39996.26 J12.1@41530,39996.26
RED_CH5: J5.1 RE11.6 | length 1210.9
  Top Layer w10: J5.1@42155,40338 42155,40410 42180,40435 42375,40435 42445,40505 42445,40895 42400,40940 42327,40940 42280,40987 42280,41100 42312.4,41132.4 RE11.6@42370,41132.4
RED_CH6: J6.1 RE13.6 | length 1041.4
  Top Layer w10: J6.1@42155,39996.26 42043.74,39996.26 42020,40020 42020,40427 42068,40475 42228,40475 42280,40527 42280,40613 42309.4,40642.4 RE13.6@42370,40642.4
RED_CH7: J7.1 RE15.6 | length 1315.3
  Top Layer w10: J7.1@42760,40338 42822,40400 42960,40400 43005,40445 43005,40912 43058,40965 43292,40965 43320,40993 43320,41100 43352.4,41132.4 RE15.6@43410,41132.4
RED_CH8: J8.1 RE17.6 | length 1225
  Top Layer w10: J8.1@42760,39996.26 42760,40040 42785,40065 43253,40065 43320,40132 43320,40613 43349.4,40642.4 RE17.6@43410,40642.4
RED_R: C42.2 RE1.5 | length 179
  Top Layer w20: RE1.5@40270,41535.79 40315.79,41535.79 C42.2@40410,41630
RED_T: RE1.7 U4.7 | length 501
  Top Layer w10: U4.7@40225,42110 40265,42110 40295,42080 40295,41905 40340,41860 40340,41779.02 RE1.7@40270,41709.02
RS232RX1: J14.2 U16.16 | length 657.6
  Top Layer w10: U16.16@42973.22,43627.36 43080.36,43627.36 43100,43647 43100,43760 43145,43805 43305,43805 43330,43830 43330,43910 J14.2@43380,43960
RS232RX2: J13.2 U16.9 | length 470.1
  Top Layer w10: U16.9@43237,43729.72 43289.72,43729.72 43325,43765 43445,43765 J13.2@43620,43940
RS232TX1: J14.1 U16.17 | length 589.9
  Top Layer w10: U16.17@42973.22,43601.77 43086.77,43601.77 43120,43635 43120,43745 43160,43785 43325,43785 43380,43840 43380,43841 J14.1@43380,43860
RS232TX2: J13.3 U16.8 | length 439.3
  Top Layer w10: U16.8@43237,43704.13 43297.13,43704.13 43338,43745 43465,43745 43560,43840 J13.3@43620,43840
RTD_SEL0: U11.84
RTD_SEL1: U11.85
SCL: J17.3 R124.2 U11.95 | length 7250.2
  Top Layer w10: R124.2@40425,40260 40480,40260 40527.48,40212.52 J17.3@40527.48,39996 ; U11.95@43212.96,42713.61 43273.61,42713.61 43335,42775 43465,42775 43540,42700 43680,42700 43808,42572 v2(43940,42572)
  Bottom Layer w10: J17.3@40527.48,39996 40527.48,39937.52 40560,39905 43471,39905 44095,40529 44095,42540 ; v2(43940,42572) 44063,42572 44093.42,42541.58
SDA: J17.2 R125.2 U11.96 | length 7260.8
  Top Layer w10: R125.2@40425,40160 40448.74,40136.26 J17.2@40448.74,39996 ; U11.96@43212.96,42733.3 43260.3,42733.3 43322,42795 43476,42795 43551,42720 43693,42720 43813,42600 v2(43960,42600)
  Bottom Layer w10: J17.2@40448.74,39996 40448.74,39940.26 40509,39880 43480,39880 44120,40520 44120,42560 44080,42600 v2(43960,42600)
SHIELD_CH1: C125.2 J9.3 | length 242.9
  Top Layer w10: C125.2@40974,40140 40974,40191.52 41082.48,40300 J9.3@41082.48,40338
SHIELD_CH2: C126.2 J10.3 | length 511.1
  Top Layer w10: J10.3@41082.48,39996.26 41082.48,39952.52 41105,39930 41270,39930 41305,39965 41305,40029 C126.2@41194,40140
SHIELD_CH3: C136.2 J11.3 | length 244.2
  Top Layer w10: J11.3@41687.48,40338 41687.48,40263.52 41799,40152 C136.2@41799,40140
SHIELD_CH4: C137.2 J12.3 | length 188.7
  Top Layer w10: C137.2@41579,40140 41579,40128 41687.48,40019.52 J12.3@41687.48,39996.26
SHIELD_CH5: C54.2 J5.3 | length 243.8
  Top Layer w10: C54.2@42202,40140 42202,40189.52 42312.48,40300 J5.3@42312.48,40338
SHIELD_CH6: C55.2 J6.3 | length 189.1
  Top Layer w10: J6.3@42312.48,39996.26 42312.48,40018.48 42422,40128 C55.2@42422,40140
SHIELD_CH7: C56.2 J7.3 | length 244.2
  Top Layer w10: J7.3@42917.48,40338 42917.48,40300 43029,40188.48 C56.2@43029,40140
SHIELD_CH8: C57.2 J8.3 | length 609.9
  Top Layer w10: C57.2@42809,40140 42740,40140 42665,40065 42665,39947 42692,39920 42878,39920 42917.48,39959.48 J8.3@42917.48,39996.26
SPI1_CS1: U11.29
SPI1_CS2: R32.1 U11.67 | length 855.8
  Top Layer w10: v2(42960,42340) 42990.52,42309.48 U11.67@42990.52,42274.64 ; v2(43340,41769) R32.1@43389.37,41769
  Bottom Layer w10: v2(42960,42340) 43340,41960 v2(43340,41769)
SPI1_MISO: R30.1 U11.31 | length 1470.5
  Top Layer w10: U11.31@42610.6,42713.61 42666.39,42713.61 42720,42660 42720,42600 v2(42940,42380) ; v2(43340,41680) R30.1@43389.63,41680
  Bottom Layer w10: v2(42940,42380) 42980,42380 43375,41985 43375,41715 v2(43340,41680)
SPI1_MOSI: U11.32
SPI1_SCK: R27.1 U11.30 | length 1621.1
  Top Layer w10: U11.30@42610.6,42733.3 42686.7,42733.3 42750,42670 42750,42630 v2(42960,42420) ; v2(43340,41590) R27.1@43389.63,41590
  Bottom Layer w10: v2(42960,42420) 42993,42420 43415,41998 43415,41665 v2(43340,41590)
SPI2_CS1: U11.51 U13.1 | length 442
  Top Layer w10: U13.1@42552.52,41900 42552.52,42179.52 42647.64,42274.64 U11.51@42675.56,42274.64
SPI2_MISO: U11.53 U13.2 | length 682.8
  Top Layer w10: U13.2@42552.52,41850 42520,41850 42500,41870 42500,42160 42670,42330 42700,42330 42714.93,42315.07 U11.53@42714.93,42274.64
SPI2_MOSI: U11.54 U13.5 | length 675.4
  Top Layer w10: U11.54@42734.61,42274.64 42734.61,42185.39 42960,41960 42960,41810 42900,41750 U13.5@42867.48,41750
SPI2_SCK: U11.52 U13.6 | length 625.1
  Top Layer w10: U11.52@42695.25,42274.64 42695.25,42194.75 42940,41950 42940,41840 42900,41800 U13.6@42867.48,41800
SW1: U12.43 U15.8 | length 531.2
  Top Layer w10: U12.43@41755,42314 41694,42314 41680,42300 41680,42227 41850,42057 U15.8@41850,41920
SW2: U12.44 U15.7 | length 423
  Top Layer w10: U12.44@41755.01,42282.99 41755.01,42184.99 41900,42040 U15.7@41900,41920
SW3: U12.2 U15.6 | length 306.5
  Top Layer w10: U12.2@41874,42195 41874,42099 41950,42023 U15.6@41950,41920
SW4: U12.3 U15.5 | length 313.9
  Top Layer w10: U12.3@41906,42195 41906,42098 42000,42004 U15.5@42000,41920
SW5: U12.4 U15.4 | length 321.8
  Top Layer w10: U12.4@41937,42195 41937,42103 42050,41990 U15.4@42050,41920
SW6: U12.7 U15.3 | length 303.6
  Top Layer w10: U12.7@42031,42195 42031,42089 42100,42020 U15.3@42100,41920
SW7: U12.8 U15.2 | length 311
  Top Layer w10: U12.8@42063,42195 42063,42092 42150,42005 U15.2@42150,41920
SW8: U12.9 U15.1 | length 318.9
  Top Layer w10: U12.9@42094,42195 42094,42093 42200,41987 U15.1@42200,41920
SWCLK: J4.3 R74.2 U11.76 | length 1829.6
  Top Layer w10: U11.76@43212.96,42339.6 v2(43279.6,42339.6) ; R74.2@43800,43395 43816,43379 43959.43,43379 J4.3@43960,43378.43
  Bottom Layer w10: v2(43279.6,42339.6) 43819.6,42339.6 43830,42350 43830,43349 v2(43860,43379)
SWDIO: J4.2 R73.2 U11.72 | length 2069.7
  Top Layer w10: v2(43080,42380) 43088.94,42371.06 U11.72@43088.94,42274.64 ; R73.2@43800,43305 43875.79,43305 43900,43329.21 J4.2@43960,43329.21
  Bottom Layer w10: v2(43080,42380) 43155,42305 43825,42305 43860,42340 v2(43860,43305)
USART1RX: U11.93 U16.15 | length 1587.6
  Top Layer w10: v2(42900,43600) 42900,43638 42914.95,43652.95 U16.15@42973.22,43652.95 ; v2(43014,42800) 43014,42736 43075.76,42674.24 U11.93@43212.96,42674.24
  Bottom Layer w10: v2(42900,43600) 43260,43240 43260,42823 43237,42800 v2(43014,42800)
USART1TX: U11.92 U16.13 | length 1778.5
  Top Layer w10: v2(42880,43700) 42884.13,43704.13 U16.13@42973.22,43704.13 ; v2(42980,42780) 42980,42740 43065.44,42654.56 U11.92@43212.96,42654.56
  Bottom Layer w10: v2(42880,43700) 42880,43660 43280,43260 43280,42805 43250,42775 42985,42775 v2(42980,42780)
USART2RX: U11.26 U16.10 | length 1955.9
  Top Layer w10: U11.26@42610.6,42812.04 42672.04,42812.04 v2(42680,42820) ; v2(43150,43660) 43150,43730 43175.31,43755.31 U16.10@43237,43755.31
  Bottom Layer w10: v2(42680,42820) 42695.62,42804.38 ; 42695.62,42804.37 42748.13,42751.86 42764.99,42735 43280,42735 43320,42775 43320,43287 43085,43522 43085,43620 43125,43660 v2(43150,43660)
USART2TX: U11.25 U16.12 | length 1870.9
  Top Layer w10: v2(42640,42877) U11.25@42675.56,42877 ; U16.12@42973.22,43729.72 43030.28,43729.72 v2(43060,43700)
  Bottom Layer w10: v2(42640,42877) 42676,42877 42798,42755 43268,42755 43300,42787 43300,43273 43060,43513 v2(43060,43700)
USART3RX: R118.2 U11.56 U18.1 | length 3860.9
  Top Layer w10: R118.2@40000,43120 v2(40048,43168) 40120,43240 40120,43340 40140,43360 U18.1@40190,43360 ; v2(42740,42460) 42773.99,42426.01 U11.56@42773.99,42274.64
  Bottom Layer w10: v2(40048,43168) 40048,42827 40125,42750 40325,42750 40475,42900 40820,42900 41265,42455 42735,42455 v2(42740,42460)
USART3TX: D40.2 R117.1 R120.1 U11.55 U18.4 | length 3356.3
  Top Layer w10: U18.4@40190,43210 40130,43210 40100,43180 R117.1@40100,43120 40134,43120 40179,43075 40240,43075 40260,43095 40260,43140 40285,43165 40475.25,43165 40504.25,43136 v2(40640,43136) ; v2(42700,42480) 42700,42460 42754.3,42405.7 U11.55@42754.3,42274.64
  Bottom Layer w10: v2(40640,43136) 41296,42480 v2(42700,42480)
USART4RX: U11.24 U12.24 | length 738.9
  Top Layer w10: U12.24@42126,42685 42126,42746 42150,42770 42185,42770 42335,42920 42684.25,42920 42695.25,42909 U11.24@42695.25,42877
USART4TX: U11.23 U12.25 | length 817.1
  Top Layer w10: U12.25@42094,42685 42094,42754 42130,42790 42170,42790 42320,42940 42693,42940 42714.93,42918.07 U11.23@42714.93,42877
VBAT: C28.2 C29.2 R22.1 U11.6 | length 700
  Top Layer w10: U11.6@43049.57,42877 43049.57,42849.43 43074,42825 43165,42825 43195,42855 43250,42855 43425,43030 43522,43030 43587,43095 R22.1@43600,43095
VIN_ADC: R2.2 R7.1 U11.15 | length 1914.1
  Top Layer w10: v2(42860,42940) 42872.41,42927.59 U11.15@42872.41,42877
  Top Layer w20: v2(42060,43690) 42020,43730 42020,43835 42054,43869 R7.1@42073.88,43869 R2.2@42073.88,43959
  Bottom Layer w20: v2(42060,43690) 42060,43600 42110,43550 42700,43550 42770,43480 42770,43390 42650,43270 42650,43150 v2(42860,42940)
VW_DRIVE: U4.2 U12.42 | length 1847.8
  Top Layer w20: U4.2@40005,42110 v2(40080,42110) ; v2(41560,42240) 41666,42346 U12.42@41755,42346
  Bottom Layer w20: v2(40080,42110) 41430,42110 v2(41560,42240)
VW_RE: R54.2 U8.1 U12.41 | length 442.7
  Top Layer w20: U8.1@41369,42240 41487,42240 41624,42377 U12.41@41755,42377
VW_RX: U11.36 U12.31 | length 833.7
  Top Layer w10: U12.31@41906,42685 41906,42620 41941,42585 42159,42585 42234,42660 42487,42660 42531.81,42615.19 U11.36@42610.6,42615.19
VW_SW1: U11.33 U12.26 | length 676.4
  Top Layer w10: U12.26@42063,42685 42063,42763 v2(42075,42775) ; v2(42190,42720) 42195,42725 42521,42725 42571.76,42674.24 U11.33@42610.6,42674.24
  Bottom Layer w10: v2(42075,42775) 42130,42720 v2(42190,42720)
VW_SW2: U11.34 U12.29 | length 836.1
  Top Layer w10: v2(41945,42775) 41969,42751 U12.29@41969,42685 ; v2(42190,42680) 42215,42705 42508,42705 42558.44,42654.56 U11.34@42610.6,42654.56
  Bottom Layer w10: v2(41945,42775) 42040,42680 v2(42190,42680)
VW_TRCN: R57.2 U11.47 | length 2497.3
  Top Layer w10: R57.2@40639.99,41535 40685,41535 v2(40700,41520) ; U11.47@42610.6,42398.65 42658.65,42398.65 v2(42680,42420)
  Bottom Layer w10: v2(40700,41520) 41000,41520 41900,42420 v2(42680,42420)
VW_TX: U11.35 U12.30 | length 792.8
  Top Layer w10: U12.30@41937,42685 41937,42623 41955,42605 42151,42605 42226,42680 42500,42680 42545.13,42634.87 U11.35@42610.6,42634.87
VWTRCN: D8.1 RE1.8 TR4.3 | length 695.8
  Top Layer w10: 40200,41835 RE1.8@40270,41835 ; D8.1@40220,41936 40200,41916 40200,41520 40230,41490 40364.99,41490 TR4.3@40382,41507.01
WHITE: R31.1 R34.1 RE2.4 RE4.4 RE6.4 RE8.4 RE10.4 RE12.4 RE14.4 RE16.4 | length 7449.1
  Top Layer w20: R31.1@43950,41679.63 R34.1@44040,41679.63
  Bottom Layer w10: RE4.4@40590,40555.79 40680,40645.79 40680,41220 40740,41280 41140,41280 41340,41480 43795.37,41480 ; RE2.4@40590,41045.79 40679.79,41045.79 ; 41560,41480 41560,40625.79 RE8.4@41630,40555.79 ; 41560.21,41045.79 RE6.4@41630,41045.79 ; 42620,41480 42620,40625.79 RE12.4@42690,40555.79 ; 42620.21,41045.79 RE10.4@42690,41045.79 ; RE16.4@43730,40555.79 43795.37,40621.16 43795.37,41480 ; RE14.4@43730,41045.79 43795.16,41045.79 ; v2(43995,41679.63) 43795.37,41480
WHITE_CH1: J9.5 RE2.3 | length 1431.3
  Top Layer w10: RE2.3@40590,41132.4 40652.6,41132.4 40680,41105 40680,41028 40738,40970 40857,40970 40900,40927 40900,40427 40927,40400 41095,40400 41122,40373 41122,40298 41140,40280 41220,40280 41239.96,40299.96 J9.5@41239.96,40338
WHITE_CH2: J10.5 RE4.3 | length 1244.9
  Top Layer w10: RE4.3@40590,40642.4 40657.6,40642.4 40680,40620 40680,40220 40840,40060 41087,40060 41122,40025 41122,39968 41140,39950 41230,39950 41239.96,39959.96 J10.5@41239.96,39996.26
WHITE_CH3: J11.5 RE6.3 | length 1588.2
  Top Layer w10: RE6.3@41630,41132.4 41692.6,41132.4 41720,41105 41720,40980 41680,40940 41440,40940 41405,40905 41405,40495 41510,40390 41697,40390 41727,40360 41727,40308 41755,40280 41825,40280 41844.96,40299.96 J11.5@41844.96,40338
WHITE_CH4: J12.5 RE8.3 | length 961.5
  Top Layer w10: RE8.3@41630,40642.4 41697.6,40642.4 41720,40620 41720,40540 41785,40475 41898,40475 41940,40433 41940,40020 41916.26,39996.26 J12.5@41844.96,39996.26
WHITE_CH5: J5.5 RE10.3 | length 1138.5
  Top Layer w10: J5.5@42469.96,40338 42465,40342.96 42465,40945 42505,40985 42745,40985 42780,41020 42780,41100 42747.6,41132.4 RE10.3@42690,41132.4
WHITE_CH6: J6.5 RE12.3 | length 941.2
  Top Layer w10: J6.5@42469.96,39996.26 42576.26,39996.26 42595,40015 42595,40389 42686,40480 42740,40480 42780,40520 42780,40613 42750.6,40642.4 RE12.3@42690,40642.4
WHITE_CH7: J7.5 RE14.3 | length 1629.6
  Top Layer w10: J7.5@43074.96,40338 43025,40387.96 43025,40897 43073,40945 43780,40945 43820,40985 43820,41100 43787.6,41132.4 RE14.3@43730,41132.4
WHITE_CH8: J8.5 RE16.3 | length 1344.6
  Top Layer w10: J8.5@43074.96,39996.26 43216.26,39996.26 43340,40120 43340,40420 43380,40460 43780,40460 43820,40500 43820,40613 43790.6,40642.4 RE16.3@43730,40642.4
pads on no net: J13.4 J13.9 U4.3 U4.5 U9.1 U9.3 U9.5 U9.7 U9.8 U11.4 U11.5 U11.7 U11.18 U11.38 U11.57 U11.58 U11.59 U11.60 U11.61 U11.62 U11.63 U11.64 U11.65 U11.66 U11.68 U11.69 U11.70 U11.71 U11.77 U11.78 U11.79 U11.80 U11.86 U11.87 U11.88 U11.90 U11.91 U11.97 U11.98 U12.13 U12.17 U12.35 U12.36 U12.37 U12.38 U12.40 U16.11 U17.1 Y1.1

## Polygon pours and split planes (outlines as drawn)
DGND on Top Layer "GND" (solid, remove dead copper, pour order 2): 39833.95,43000 41380,43000 41380,41620 44164.66,41620 44175,41630.34 44175,44175 39825,44175 39833.95,44166.05 39833.95,43000
DGND on Bottom Layer "GND" (solid, remove dead copper, pour order 4): 39840,43000 41386.05,43000 41386.05,41620 44170.71,41620 44170.71,44164.66 44181.05,44175 39831.05,44175 39831.05,43008.95 39840,43000

## Keep-outs
Keep-Out Layer:
  lines w10: 39833.95,39952.55 ccw(c39952.06,39952.55) 39952.06,39834.44 44046.55,39834.44 ccw(c44046.55,39952.55) 44164.66,39952.55 44164.66,44047.04 ccw(c44046.55,44047.04) 44046.55,44165.15 39952.06,44165.15 ccw(c39952.06,44047.04) 39833.95,44047.04 39833.95,39952.55

## Other copper
Top Layer:
  rectangle net +VIN: 43500,42100 43615,42190
  rectangle net +5VDD: 43500,42460 43600,42560
  rectangle net +5VDD: 42440,43390 42740,43459
  rectangle net +5VDD: 41320,43180 41380,43230
  rectangle net +5VDD: 41180,43146 41330,43230
  rectangle net NetD1_1: 40900,43920 41220,44140
  rectangle net NetD1_2: 41020,43720 41380,43880
  rectangle net +VIN: 41260,43900 41860,44140
  rectangle net +VIN: 41820,43960 42000,44140
  rectangle net +VIN: 41980,44000 42100,44140
  rectangle net +VIN: 41405,43640 41500,43930
  rectangle net +VIN: 41460,43640 41660,43720
  rectangle net +VIN: 41580,43580 41660,43657
  rectangle net NetC1_1: 42235,43480 42350,43860
  rectangle net NetC1_1: 42245,43850 42291,43916
  rectangle net NetC1_1: 42262,43909 42288,43930
  rectangle net NetC1_1: 42283,43853 42303,43874
  rectangle net +VIN: 42146,43958.41 42241,44024
  rectangle net +VIN: 42094,44013 42167,44099
  rectangle net +VIN: 42093,44089 42137,44127
  rectangle net +VIN: 42128,44090 42150,44113
  rectangle net +VIN: 42163,44012 42201,44064
  rectangle net +VIN: 42196,44017 42222,44045
  rectangle net +VIN: 42162,44058 42185,44079
  rectangle net +VIN: 42236,43960 42267,43992
  rectangle net +VIN: 42261,43958.41 42283,43980
  rectangle net +VIN: 42232,43988 42258,44007
  rectangle net +VIN: 42123,43986 42153,44016
  rectangle net +VIN: 42133,43976 42153,43991
  rectangle net +VIN: 42108,43997 42131,44018
  rectangle net +VIN: 42149,43849 42199,43970
  rectangle net NetC1_2: 42320,43980 42360,44084
  rectangle net +5VDD: 42460,43440 42740,43600
  rectangle net +5VDD: 42700,43520 42840,43600
  rectangle net +3.3VDD: 41706,43316 41820,43467
  rectangle net +3.3VDD: 41800,43380 41867,43467
Bottom Layer:
  rectangle net +3.3VDD: 41780,43395 41875,43467

## Silkscreen, mask and mechanical layers (free items; w line width, h text height)
Top Overlay:
  circle w10: c40031,43968 r196.85
  circle w10: c43968,43968 r196.85
  circle w10: c43968,40031 r196.85
  circle w10: c40031,40031 r196.85
  lines w5: 40719.75,41718.83 ccw(c40877.23,41718.83) 40877.23,41561.35 43121.33,41561.35 ccw(c43121.33,41718.83) 43278.81,41718.83 43278.81,43962.93 ccw(c43121.33,43962.93) 43121.33,44120.41 40877.23,44120.41 ccw(c40877.23,43962.93) 40719.75,43962.93 40719.75,41718.83
  text "GND" at 43315,44025 h30 r90
  text "RX" at 43315,43925 h30 r90
  text "TX" at 43320,43830 h30 r90
  text "-" at 40390.55,43785 h90
  text "-" at 40765,43785 h90
  text "+" at 40645,43780 h90
  text "+" at 40985,43760 h90
  text "A" at 40130,43515 h60 r270
  text "B" at 40130,43445 h60 r270
  text "R" at 40910,40435 h30
  text "B" at 40990,40435 h30
  text "G" at 41145,40435 h30
  text "W" at 41225,40435 h30
  text "1" at 41360,40275 h120
  text "7" at 43200,40275 h120
  text "3" at 41960,40270 h120
  text "5" at 42575,40270 h120
  text "3.3V" at 40310,40085 h30
  text "SDA" at 40410,40085 h30
  text "SCL" at 40495,40085 h30
  text "GND" at 40580,40085 h30
  text "GND" at 40680,40085 h30
  text "4" at 41950,39935 h120
  text "PN:RD15002-20150923" at 43310,39935 h30
  text "8" at 43210,39930 h120
  text "2" at 41345,39920 h120
  text "6" at 42575,39920 h120
  text "VN:RD15002 V1.0.0" at 43310,39880 h30
Mechanical 1:
  lines w10: 39833.95,39952.55 ccw(c39952.06,39952.55) 39952.06,39834.44 44046.55,39834.44 ccw(c44046.55,39952.55) 44164.66,39952.55 44164.66,44047.04 ccw(c44046.55,44047.04) 44046.55,44165.15 39952.06,44165.15 ccw(c39952.06,44047.04) 39833.95,44047.04 39833.95,39952.55

## Text inside footprints (layer, text, board x,y; h text height)
BT1: Top Overlay "-" at 43780,42680 h60 r90; Top Overlay "+" at 44005,42680 h60 r90
J3: Top Overlay "1" at 42240,42980 h50 r180
RE1: Top Overlay "8" at 40220,41825 h30 r90; Top Overlay "1" at 40120,41840 h30 r270
RE2: Top Overlay "8" at 40740,41335 h30 r90; Top Overlay "1" at 40640,41350 h30 r270
RE3: Top Overlay "8" at 40220,41335 h30 r90; Top Overlay "1" at 40120,41350 h30 r270
RE4: Top Overlay "8" at 40740,40845 h30 r90; Top Overlay "1" at 40640,40860 h30 r270
RE5: Top Overlay "8" at 40220,40845 h30 r90; Top Overlay "1" at 40120,40860 h30 r270
RE6: Top Overlay "8" at 41780,41335 h30 r90; Top Overlay "1" at 41680,41350 h30 r270
RE7: Top Overlay "8" at 41260,41335 h30 r90; Top Overlay "1" at 41160,41350 h30 r270
RE8: Top Overlay "8" at 41780,40845 h30 r90; Top Overlay "1" at 41680,40860 h30 r270
RE9: Top Overlay "8" at 41260,40845 h30 r90; Top Overlay "1" at 41160,40860 h30 r270
RE10: Top Overlay "1" at 42740,41350 h30 r270; Top Overlay "8" at 42840,41335 h30 r90
RE11: Top Overlay "1" at 42220,41350 h30 r270; Top Overlay "8" at 42320,41335 h30 r90
RE12: Top Overlay "1" at 42740,40860 h30 r270; Top Overlay "8" at 42840,40845 h30 r90
RE13: Top Overlay "1" at 42220,40860 h30 r270; Top Overlay "8" at 42320,40845 h30 r90
RE14: Top Overlay "1" at 43780,41350 h30 r270; Top Overlay "8" at 43880,41335 h30 r90
RE15: Top Overlay "1" at 43260,41350 h30 r270; Top Overlay "8" at 43360,41335 h30 r90
RE16: Top Overlay "1" at 43780,40860 h30 r270; Top Overlay "8" at 43880,40845 h30 r90
RE17: Top Overlay "1" at 43260,40860 h30 r270; Top Overlay "8" at 43360,40845 h30 r90